# Altium PCB PCB1.PcbDoc
Units mm, origin at the board's own origin, x right, y up, seen from the top; angles counter-clockwise.
Board outline 88 x 61.5 mm, 2 copper layers (Top Layer, Bottom Layer); 22 components, 29 nets, 107 pads, 10 vias.
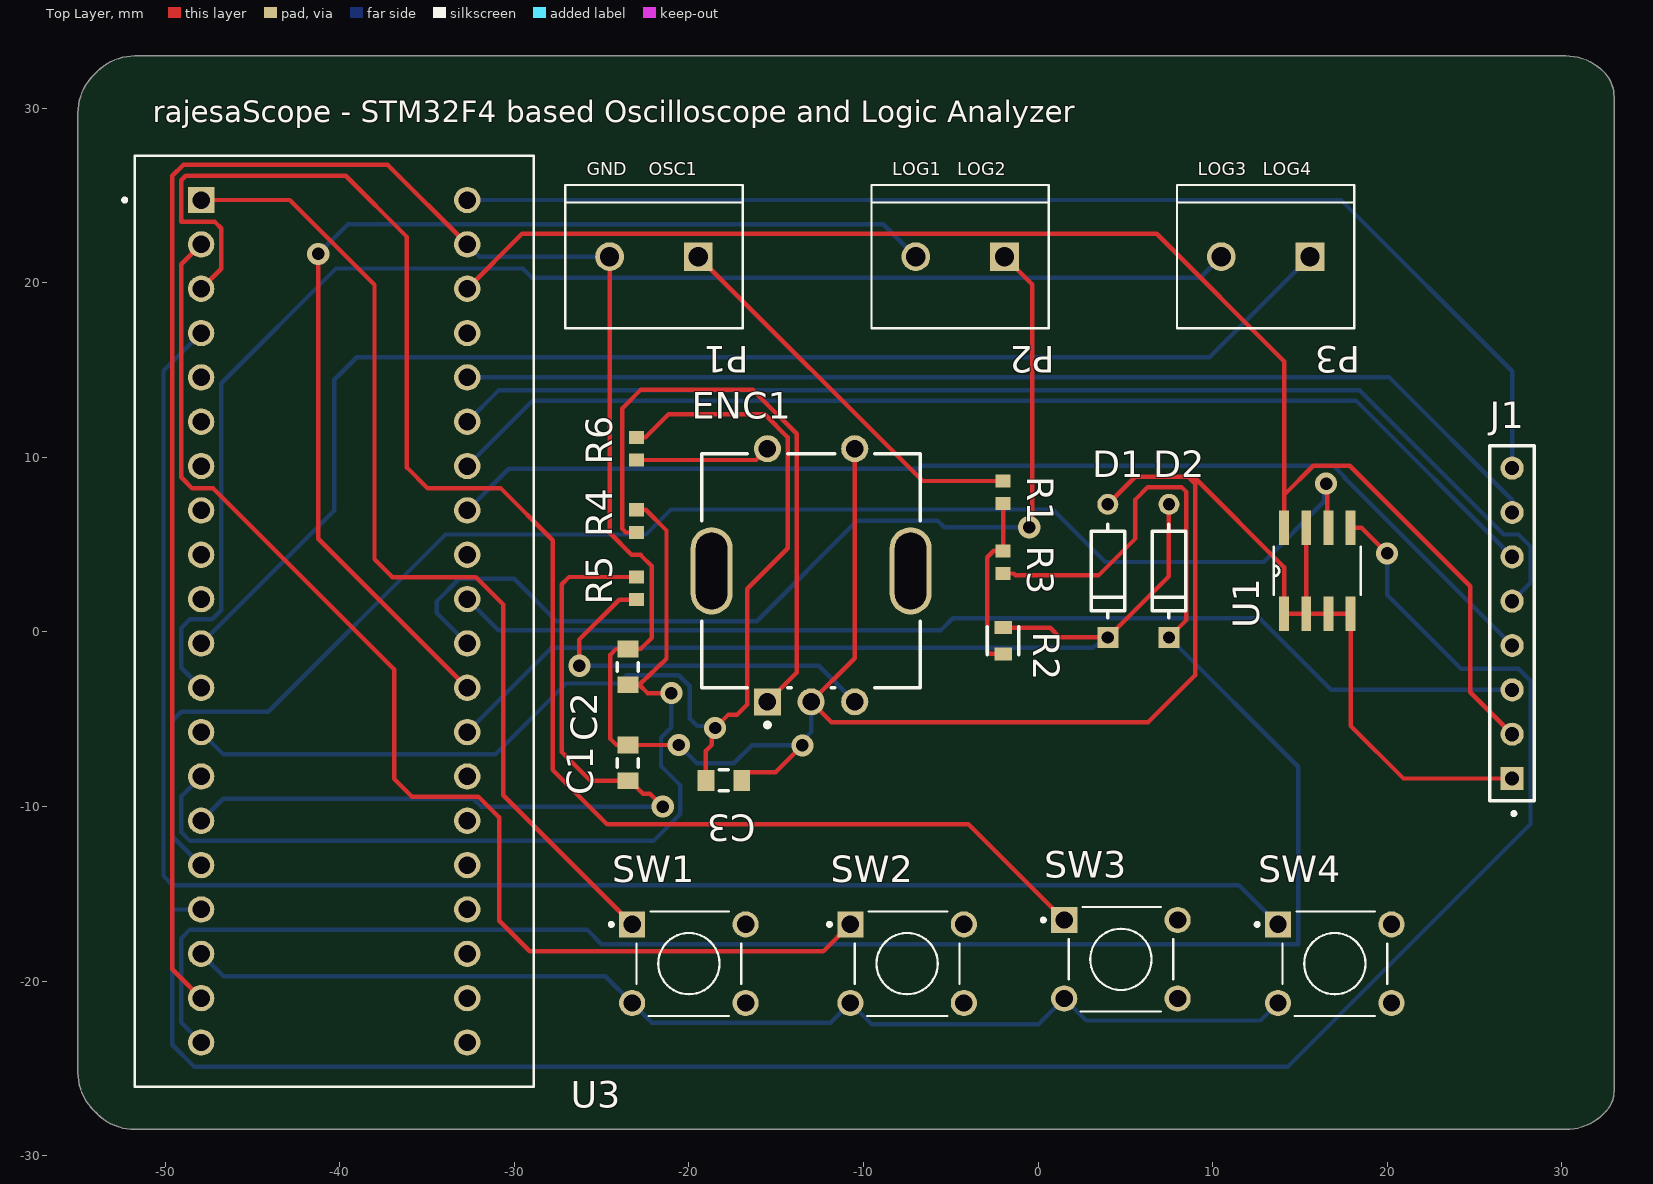
[diagram p0: Top Layer view]
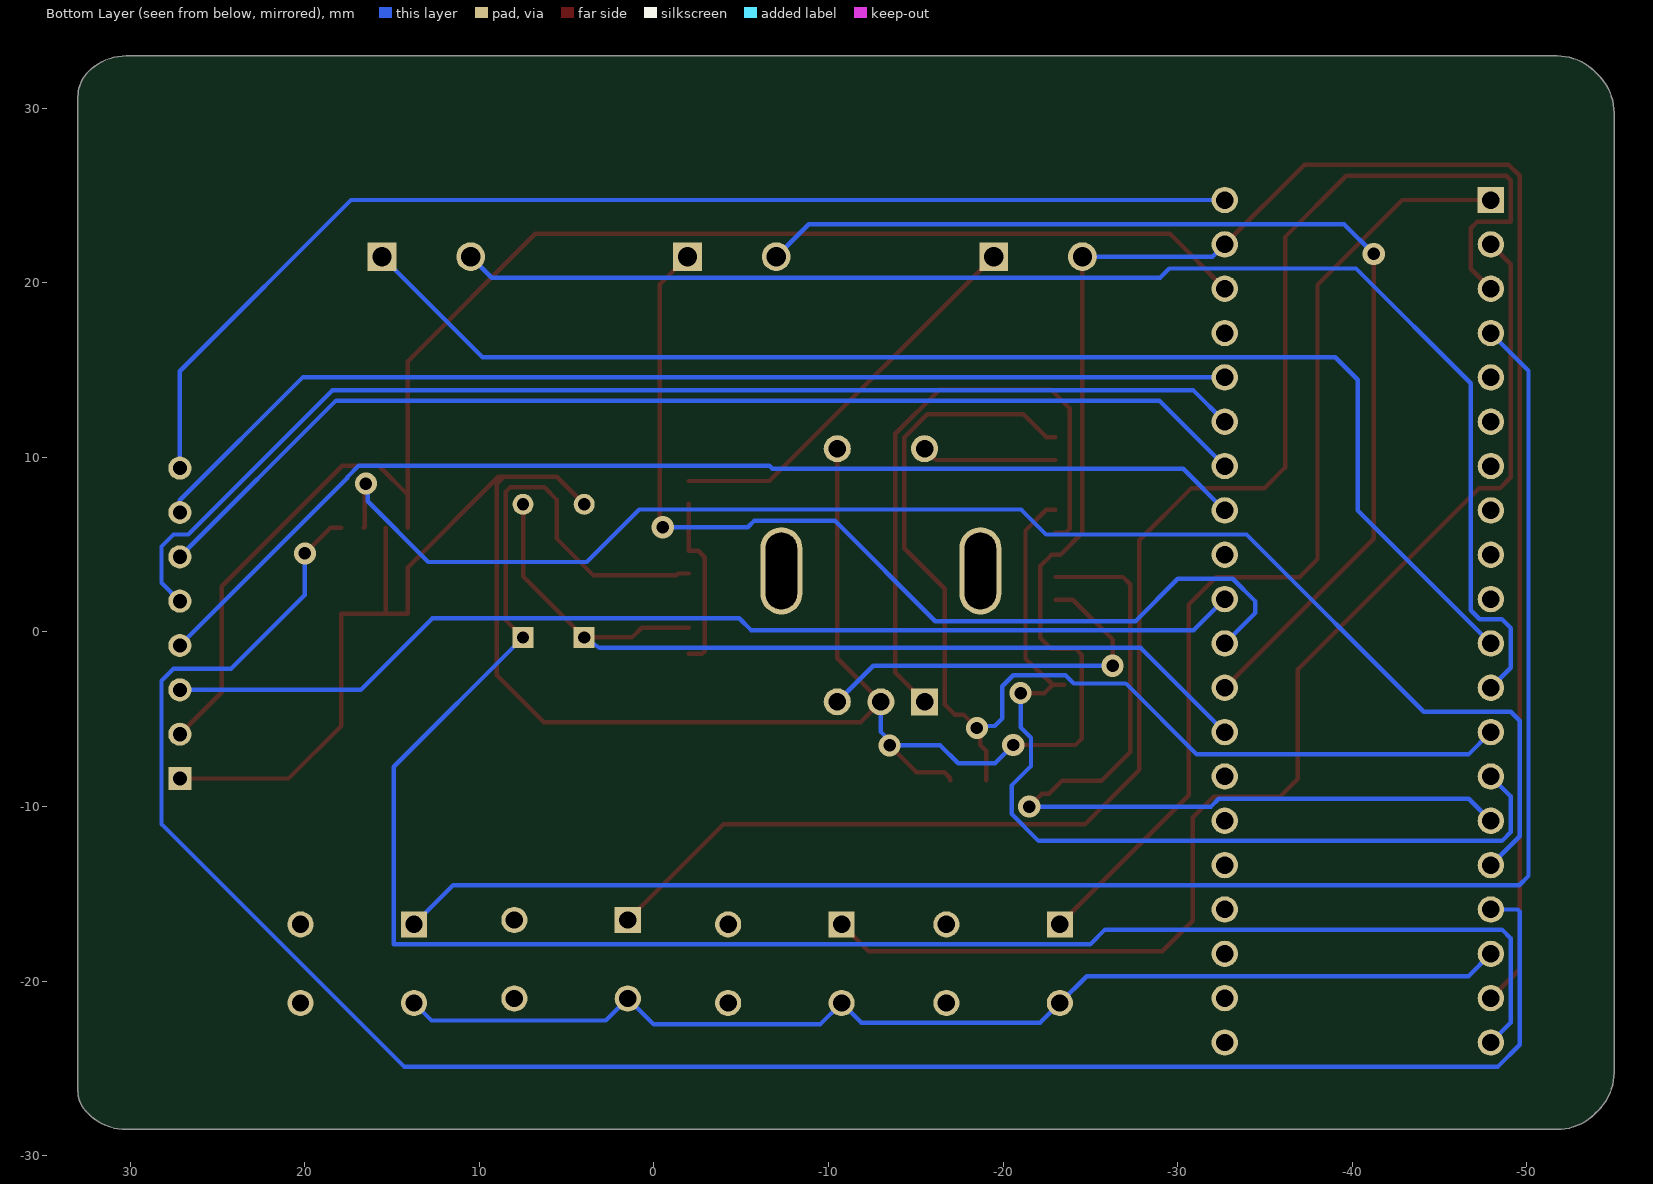
[diagram p1: Bottom Layer view, seen from below]
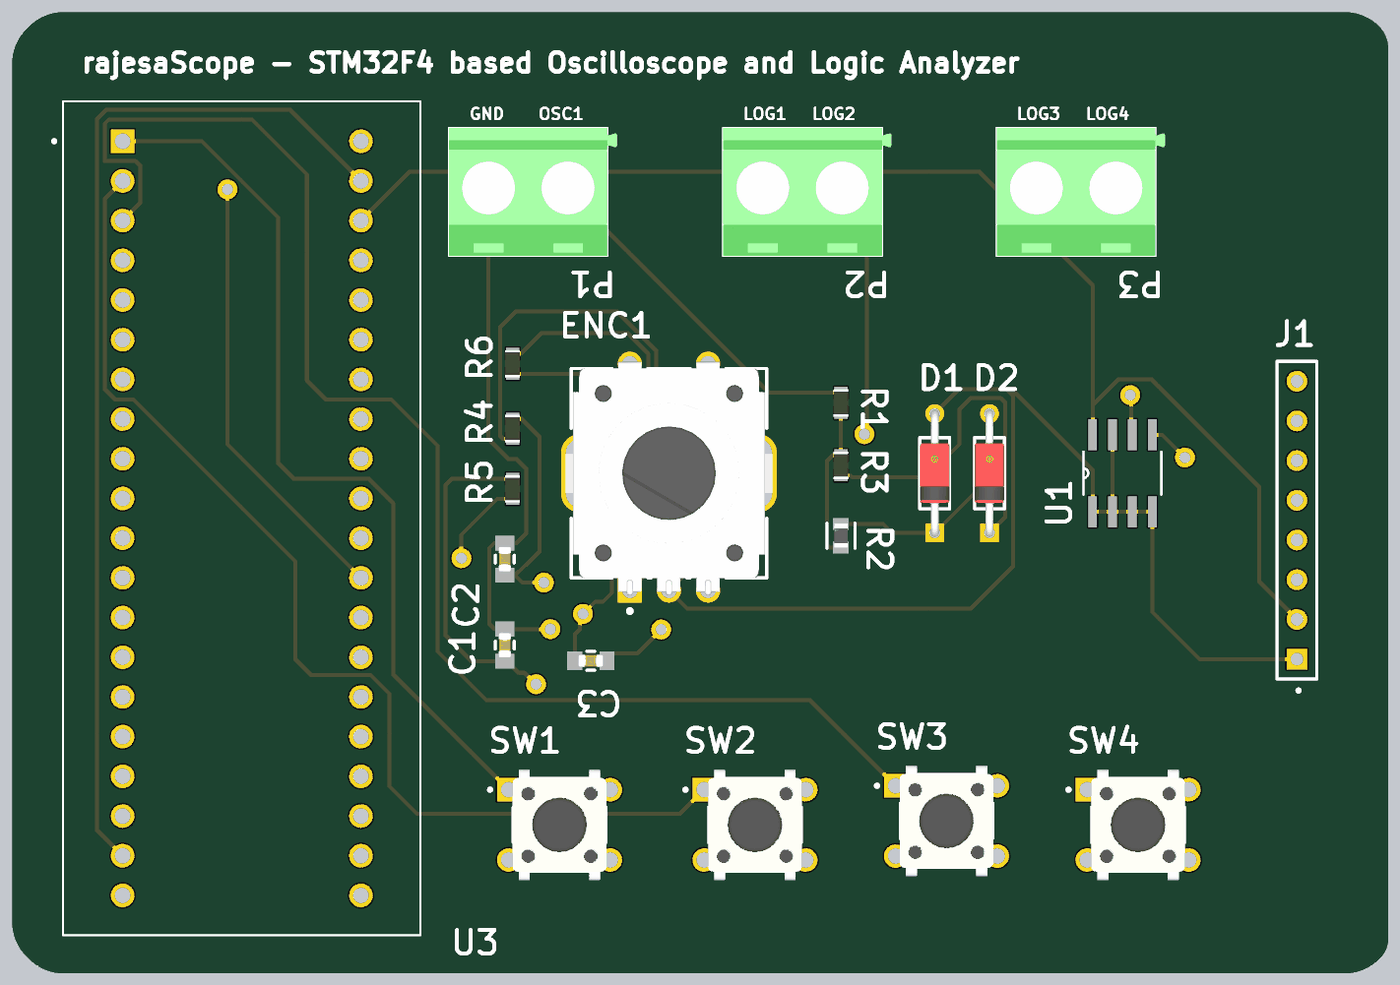
[diagram p2: 3D render of the assembled board from above, using the file's embedded part models]

## Layer stack, top to bottom
Top Solder: solder mask 0.0102, Solder Resist, Dk 3.5
Top Layer: signal copper 0.0356
Dielectric 1: dielectric 0.32, FR-4, Dk 4.8
Bottom Layer: signal copper 0.0356
Bottom Solder: solder mask 0.0102, Solder Resist, Dk 3.5

## Board outline
-54.102,-27.398 cw(c-51.934,-25.23) -55,-25.23 -55,29.73 cw(c-51.934,29.73) -54.102,31.898 -53.898,32.102 cw(c-51.73,29.934) -51.73,33 30.23,33 cw(c30.23,29.934) 32.398,32.102 cw(c30.945,30.649) 33,30.649 33,-26.293 cw(c31.293,-26.293) 32.5,-27.5 32.398,-27.602 cw(c30.23,-25.434) 30.23,-28.5 -51.73,-28.5 cw(c-51.73,-25.434) -53.898,-27.602

## Design rules (kind name [scope] priority, off if disabled: settings)
Clearance [All] p1: gap=0.254 ignorepadtopadclearanceinfootprint=FALSE
PolygonConnect [All] p1: connectstyle=Relief reliefconductorwidth=0.254 reliefentries=4 polygonreliefangle="90 Angle" airgapwidth=0.254
RoutingVias [All] p1: holewidth=0.711 width=1.27 viastyle="Through Hole" minholewidth=0.711 minwidth=1.27 maxholewidth=0.711 maxwidth=1.27
SolderMaskExpansion [All] p1: expansion=0.102 istentingtop=FALSE
SupplyNets "Schematic Supply Nets" [InNet('GND')] p1: voltage=0.000
Width [All] p1: maxlimit=0.254 minlimit=0.254 preferedwidth=0.254
30 further rules are at their usual default settings.

## Components (designator, comment, footprint, x,y, rotation, side; value= is the part's Value field where it differs from the comment)
C1 "CGA3E2X7R1H104K080AA" FP-CGA3E-0_3-0_1-IPC_A -23.5,-7.5 r90 top
C2 "CGA3E2X7R1H104K080AA" FP-CGA3E-0_3-0_1-IPC_A -23.5,-2 r90 top
C3 "CGA3E2X7R1H104K080AA" FP-CGA3E-0_3-0_1-IPC_A -18,-8.5 r180 top
D1 "1N4148" FP-017AG-MFG 4,3.5 r90 top
D2 "1N4148" FP-017AG-MFG 7.5,3.5 r90 top
ENC1 "PEC11R-4215F-S0024" FP-PEC11R-4215F-S0024-MFG -13,3.5 r0 top
J1 "TS-108-X-A-1" SAMTEC_TS-108-X-A-1 27.16,0.495 r90 top
P1 "282837-2" TE_282837-2 -22,21.5 r180 top
P2 "282837-2" TE_282837-2 -4.46,21.5 r180 top
P3 "282837-2" TE_282837-2 13.04,21.5 r180 top
R1 "ERJ3EKF1002V" RESC1609X55X30LL15T15 -2,8 r270 top
R2 "CRCW06031K00FKEA" FP-CRCW0603-e3-MFG -2,-0.5 r90 top
R3 "ERJ3EKF1002V" RESC1609X55X30LL15T15 -2,4 r270 top
R4 "ERJ3EKF1002V" RESC1609X55X30LL15T15 -23,6.35 r90 top
R5 "ERJ3EKF1002V" RESC1609X55X30LL15T15 -23,2.5 r90 top
R6 "ERJ3EKF1002V" RESC1609X55X30LL15T15 -23,10.5 r90 top
SW1 "1825910-6" SW_1825910-6-4 -20,-19 r0 top
SW2 "1825910-6" SW_1825910-6-4 -7.5,-19 r0 top
SW3 "1825910-6" SW_1825910-6-4 4.75,-18.75 r0 top
SW4 "1825910-6" SW_1825910-6-4 17,-19 r0 top
U1 "AT24C01A-10SI-2.7" SOIC127P600X175-8N 16,3.5 r90 top
U3 "STM32F103C8T6" MODULE_ZC323000 -40.319,0.614 r0 top

## Footprints (in the part's own frame and the unit in brackets; to place one, negate y for a bottom-side part, rotate by r counter-clockwise, add the part's x,y. Pads: shape width x height; smd on the part's side, far side on the other; paste and mask are expansions set on the pad)
FP-017AG-MFG [mm]
  rect 1.2x1.2 hole 0.7 paste-2539.97 mask+0: 1(-3.813,0)
  round 1.2 hole 0.7 paste-2539.97 mask+0: 2(3.813,0)
  silkscreen extent -2.68,-0.96 2.68,0.95, body extent -4.51,-1.05 4.51,1.05, height 0.25
FP-CGA3E-0_3-0_1-IPC_A [mm]
  rect 0.956x1.206 smd paste+0 mask+0: 1(-1.025,0) 2(1.025,0)
  silkscreen extent -0.25,-0.6 0.25,0.6, body extent -2,-1.1 2,1.1, height 0.25
FP-CRCW0603-e3-MFG [mm]
  rect 0.75x1 smd paste+0 mask+0: 1(-0.75,0) 2(0.75,0)
  silkscreen extent -0.8,-0.9 0.8,0.9, body extent -1.22,-0.6 1.22,0.6, height 0.25
FP-PEC11R-4215F-S0024-MFG [mm]
  round 1.55 hole 1 paste-2539.97 mask+0: 1(-2.5,7) 2(2.5,7) B(2.5,-7.5) C(0,-7.5)
  rrect100% 2.4x5 hole 4.4 slot 1.8 at 0 deg paste-2539.97 mask+0: 3(-5.7,0) 4(5.7,0)
  rect 1.55x1.55 hole 1 paste-2539.97 mask+0: A(-2.5,-7.5)
  silkscreen extent -6.25,-8.95 6.25,6.7, body extent -7,-8.37 7,7.88, height 0.25
MODULE_ZC323000 [mm]
  rect 1.508x1.508 hole 1: 1(-7.62,24.13)
  round 1.508 hole 1: 2(-7.62,21.59) 3(-7.62,19.05) 4(-7.62,16.51) 5(-7.62,13.97) 6(-7.62,11.43) 7(-7.62,8.89) 8(-7.62,6.35) 9(-7.62,3.81) 10(-7.62,1.27) 11(-7.62,-1.27) 12(-7.62,-3.81) 13(-7.62,-6.35) 14(-7.62,-8.89) 15(-7.62,-11.43) 16(-7.62,-13.97) 17(-7.62,-16.51) 18(-7.62,-19.05) 19(-7.62,-21.59) 20(-7.62,-24.13) 21(7.62,-24.13) 22(7.62,-21.59) 23(7.62,-19.05) 24(7.62,-16.51) 25(7.62,-13.97) 26(7.62,-11.43) 27(7.62,-8.89) 28(7.62,-6.35) 29(7.62,-3.81) 30(7.62,-1.27) 31(7.62,1.27) 32(7.62,3.81) 33(7.62,6.35) 34(7.62,8.89) 35(7.62,11.43) 36(7.62,13.97) 37(7.62,16.51) 38(7.62,19.05) 39(7.62,21.59) 40(7.62,24.13)
  silkscreen extent -12.1,-26.67 11.43,26.67
RESC1609X55X30LL15T15 [mm] "Chip Resistor, 2-Leads, Body 1.75x0.95mm, IPC High Density"
  rect 0.75x0.85 smd: 1(-0.65,0) 2(0.65,0)
  body extent -0.87,-0.48 0.87,0.48, height 0.55
SAMTEC_TS-108-X-A-1 [mil]
  rect 52x52 hole 32: 01(-350,0)
  round 52 hole 32: 02(-250,0) 03(-150,0) 04(-50,0) 05(50,0) 06(150,0) 07(250,0) 08(350,0)
  silkscreen extent -433,-50 400,50
SOIC127P600X175-8N [mil]
  rect 78x22 smd: 1(-97,75) 2(-97,25) 3(-97,-25) 4(-97,-75) 5(97,-75) 6(97,-25) 7(97,25) 8(97,75)
  silkscreen extent -54,-98 54,98
SW_1825910-6-4 [mm]
  rect 1.498x1.498 / inner round 1.498 / far side rect 1.498x1.498 hole 0.99: 1(-3.25,2.25)
  round 1.498 hole 0.99: 2(3.25,2.25) 3(-3.25,-2.25) 4(3.25,-2.25)
  silkscreen extent -4.54,-3 3,2.99, body extent -3,-3.9 3,3.9, height 5.01
TE_282837-2 [mm]
  rect 1.65x1.65 / inner round 1.65 / far side rect 1.65x1.65 hole 1.1: 1(-2.54,0)
  round 1.65 hole 1.1: 2(2.54,0)
  silkscreen extent -5.08,-4.1 5.08,4.1, body extent -5.68,-4.1 5.08,4.1, height 10

## Part data
C1 C2 C3: library part CMP-2000-07546-2, "Cap Ceramic 100nF 50V X7R 10% Pad SMD 0603 +125°C Automotive T/R", Capacitance=100nF, Case Code (Imperial)=0603, Case Code (Metric)=1608, Dielectric=X7R, Max Operating Temperature=125°C, Min Operating Temperature=-55°C, Package Quantity=1, Ratings=AEC-Q200, Tolerance=10%, Voltage=50V, Case/Package=0603, Composition=Ceramic, Depth=0.8mm, Height=0.8mm, Lead Free="Lead Free", Length=1.6mm, Mount="Surface Mount", Packaging="Tape and Reel", Radiation Hardening=No, REACH SVHC="No SVHC", Termination=SMD/SMT, Thickness=0.035inch, Voltage Rating=50V, Voltage Rating (DC)=50V, Weight=7.1E-05oz, Width=0.8mm
D1 D2: library part CMP-07163-000046-1, "DIODE GEN PURP 100V 200MA DO35", Average Rectified Current=200mA, Capacitance=4pF, Case/Package=DO-35, Current=4A, Forward Current=300mA, Forward Voltage=1V, Max Forward Surge Current (Ifsm)=1A, Max Operating Temperature=175°C, Max Power Dissipation=500mW, Max Repetitive Reverse Voltage (Vrrm)=100V, Max Reverse Current=5uA, Min Operating Temperature=-65°C, Package Quantity=2000, Contact Plating=Tin, Current Rating=200mA, Diameter=1.91mm, Element Configuration=Single, Height=4.56mm, Lead Free="Lead Free", Length=4.56mm, Max Reverse Voltage (DC)=100V, Max Surge Current=4A, Mount="Through Hole", Number of Pins=2, Output Current=200mA, Outside Diameter=1.85mm, Packaging=Bulk, Peak Non-Repetitive Surge Current=4A, Polarity=Standard, Power Dissipation=500mW, Radiation Hardening=No, REACH SVHC="No SVHC", Recovery Time=4ns, Reverse Recovery Time=4ns, Reverse Voltage=100V, Series=-, Voltage=100V, Voltage Rating (DC)=100V, Weight=0.01lb, Width=1.91mm
ENC1: library part CMP-1747-00012-2, "ROTARY ENCODER MECHANICAL 24PPR", Max Operating Temperature=70°C, Min Operating Temperature=-30°C, Package Quantity=150, Built in Switch=Yes, Detent=Yes, Encoder Type=Mechanical, Height=13.4mm, Hole Diameter=1.8mm, Length=21.5mm, Mount="Through Hole", Number of Channels=2, Orientation=Vertical, Output Type=Quadrature, Packaging=Bulk, Pulses per Revolution=24, Radiation Hardening=No, REACH SVHC="No SVHC", RoHS Compliant=Yes, Series=PEC11R, Termination="PC Pins", Type=Mechanical, Width=12.5mm
J1: "TS Series .100 Single Row Screw Machine Terminal Strip", Package=None, Availability=Bad, Check_prices=https://www.snapeda.com/parts/TS-108-G-A-1/Samtec/view-part/4699387/?ref=eda, MF=Samtec, MP=TS-108-G-A-1, Price=None, SnapEDA_Link=https://www.snapeda.com/parts/TS-108-G-A-1/Samtec/view-part/4699387/?ref=snap
P1 P2 P3: "Ð Ð°Ð·ÑŠÐµÐ¼Ð½Ñ‹Ðµ ÐºÐ»ÐµÐ¼Ð¼Ð½Ñ‹Ðµ ÐºÐ¾Ð»Ð¾Ð´ÐºÐ¸ Ð Ð¾Ð·ÐµÑ‚ÐºÐ° 2 Ð¿Ð¾Ð»Ð¾Ð¶ÐµÐ½Ð¸Ñ 5,08 Ð¼Ð¼ ÐŸÑ€Ð¸Ð¿Ð¾Ð¹ Ð¿Ñ€ÑÐ¼Ð¾Ð¹ Ñ‡ÐµÑ€ÐµÐ· Ð¾Ñ‚Ð²ÐµÑ€ÑÑ‚Ð¸Ðµ 13,5 Ð / ÐºÐ¾Ð½Ñ‚Ð°ÐºÑ‚", Package=None, Availability="In Stock", Check_prices=https://www.snapeda.com/parts/282837-2/TE+Connectivity+AMP+Connectors/view-part/?ref=eda, MF="TE Connectivity", MP=282837-2, Price=None, Purchase-URL=https://pricing.snapeda.com/search/part/282837-2/?ref=eda, SnapEDA_Link=https://www.snapeda.com/parts/282837-2/TE+Connectivity+AMP+Connectors/view-part/?ref=snap
R1 R3 R4 R5 R6: library part CMP-1012-00623-3, "Chip Resistor, 10 KOhm, +/- 1%, 0.1 W, -55 to 155 degC, 0603 (1608 Metric), RoHS, Tape and Reel", Case Code (Imperial)=0603, Case Code (Metric)=1608, Manufacturer=Panasonic, Max Operating Temperature=155degC, Max Power Dissipation=100mW, Min Operating Temperature=-55degC, Package Description="2-Pin Surface Mount Device, Body 1.6 x 0.85 mm", Package Quantity=1, Package Reference=603, Resistance=10KOhm, Temperature Coefficient=100ppm\/degreesC, Tolerance=1%, Voltage Rating=75V, Case\/Package=0603, Composition=ThickFilm, Contact Plating=Tin, Datasheet URL=https://industrial.panasonic.com/cdbs/www-data/pdf/RDA0000/AOA0000C304.pdf, Datasheet Version=02/2017, Depth=0.8mm, Height=0.45mm, Lead Free=LeadFree, Length=1.6mm, Manufacturer URL=http://www.panasonic.com/, Military Standard=Not, Mount=SurfaceMount, Mounting Technology=SurfaceMount, Number of Pins=2, Number of Terminations=2, Packaging=TapeandReel, Power Rating=100mW, Radiation Hardening=No, REACH SVHC=NoSVHC, RoHSCompliant=true, Termination=SMD/SMT, Voltage Rating (DC)=75V, Width=0.031inch
R2: library part CMP-1666-00003-5, "RES Thick Film, 1kΩ, 1%, 0.1W, 100ppm/°C, 0603", Case Code (Imperial)=0603, Case Code (Metric)=1608, Max Operating Temperature=155°C, Max Power Dissipation=100mW, Min Operating Temperature=-55°C, Package Quantity=10, Resistance=1kR, Temperature Coefficient=100ppm/°C, Tolerance=1%, Voltage Rating=75V, Case/Package=0603, Composition="Thick Film", Contact Plating=Tin, Depth=0.85mm, Features="Automotive AEC-Q200", Height=0.45mm, Lead Free="Lead Free", Length=1.55mm, Military Standard=Not, Mount="Surface Mount", Number of Pins=2, Number of Terminations=2, Packaging="Tape and Reel", Power Rating=100mW, Radiation Hardening=No, Termination=SMD/SMT, Voltage Rating (DC)=75V, Weight=7.1E-05oz, Width=0.033inch
SW1 SW2 SW3 SW4: "Switch Push Button OFF (ON) SPST Round Button 0.05A 24VDC Momentary Contact PC Pins Thru-Hole", Package=None, Check_prices=https://www.snapeda.com/parts/1825910-6/TE+Connectivity+ALCOSWITCH+Switches/view-part/?ref=eda, Digi-Key_Part_Number=450-1650-ND, MF="TE Connectivity", MP=1825910-6, Purchase-URL=https://pricing.snapeda.com/search/part/1825910-6/?ref=eda, SnapEDA_Link=https://www.snapeda.com/parts/1825910-6/TE+Connectivity+ALCOSWITCH+Switches/view-part/?ref=snap
U1: "Two-wire Serial EEPROM", Package=None, Availability=Unavailable, MP=AT24C01A-10SI-2.7, Price=None
U3: library part BluePill, "Designed By @Alixahedi"

## Via types
v1: diameter 1.27, hole 0.711, Top Layer to Bottom Layer, 10 vias

## Nets (pads, with @x,y where several pads share a name; then routed paths per layer and width w, separated by ;. In a path a pad name is that pad's centre, name@x,y a point inside that pad or via, vN(x,y) a via of type N, cw(c..) or ccw(c..) an arc to the next point about the centre after c; other vN are vias at no path point)
3V: D2.1 R3.2 U3.20 | length 114.4
  Top Layer w0.254: R3.2 -1.401,3.35 -1.291,3.24 3.463,3.24 5.578,5.355 5.578,7.59 6.29,8.301 8.22,8.301 8.499,8.022 8.499,0.686 D2.1
  Bottom Layer w0.254: U3.20 -49.082,-22.373 -49.082,-17.556 -48.574,-17.048 -25.841,-17.048 -25.003,-17.886 14.9,-17.886 14.9,-7.713 D2.1
3V-2: J1.02 U1.8 U3.38 | length 84.3
  Top Layer w0.254: U3.38 -29.558,22.805 6.805,22.805 14.095,15.515 14.095,7.844 ; U1.8 14.095,7.844 ; J1.02 24.755,-3.45 24.755,2.612 17.851,9.516 15.767,9.516 14.095,7.844
5V: SW1.3 SW2.3 SW3.3 SW4.3 U3.18 | length 65.9
  Bottom Layer w0.254: U3.18 -46.66,-19.715 -24.785,-19.715 SW1.3 -22.118,-22.382 -11.882,-22.382 SW2.3 -9.516,-22.484 0.016,-22.484 SW3.3 2.755,-22.255 12.745,-22.255 SW4.3
5V-2: J1.08 U3.40 | length 69.5
  Bottom Layer w0.254: U3.40 17.355,24.744 27.16,14.939 J1.08
A2: D1.1 D2.2 R2.2 U3.28 | length 54.2
  Top Layer w0.254: R2.2 0.702,0.25 1.265,-0.313 D1.1 7.5,3.187 D2.2
  Bottom Layer w0.254: U3.28 -27.873,-0.91 3.131,-0.91 D1.1
A3: P2.2 U3.29 | length 64.1
  Top Layer w0.254: v1(-41.234,21.662) -41.234,5.339 U3.29
  Bottom Layer w0.254: v1(-41.234,21.662) -39.532,23.363 -8.863,23.363 P2.2
A4: P2.1 U3.30 | length 57.4
  Top Layer w0.254: P2.1 -0.34,19.92 -0.34,6.16 v1(-0.5,6)
  Bottom Layer w0.254: U3.30 -34.452,1.097 -34.452,1.748 -33.157,3.043 -30.007,3.043 -27.583,0.619 -16.113,0.619 -10.351,6.381 -5.754,6.381 -5.372,6 v1(-0.5,6)
A5: J1.03 U3.31 | length 62.6
  Bottom Layer w0.254: U3.31 -30.926,0.111 -5.558,0.111 -4.886,0.783 12.69,0.783 16.788,-3.315 J1.03
A7: J1.04 U3.33 | length 65.2
  Bottom Layer w0.254: U3.33 -30.319,9.344 -6.785,9.344 -6.613,9.516 16.921,9.516 17.583,8.854 17.583,8.802 J1.04
B0: J1.06 U3.34 | length 65.1
  Bottom Layer w0.254: U3.34 -28.949,13.254 18.211,13.254 J1.06
B1: J1.05 U3.35 | length 68.9
  Bottom Layer w0.254: U3.35 -30.905,13.838 18.431,13.838 26.686,5.583 27.524,5.583 28.21,4.898 28.21,2.815 J1.05
B2: J1.07 U3.36 | length 63.5
  Bottom Layer w0.254: U3.36 -32.683,14.6 20.107,14.6 27.16,7.548 J1.07
GND: C1.2 C2.2 C3.1 D1.2 ENC1.2 ENC1.C J1.01 P1.2 U1.1 U1.2 U1.3 U1.4 U1.7 U3.19 U3.39 | length 217
  Top Layer w0.254: U3.19 -49.59,-19.325 -49.59,26.132 -48.955,26.767 -37.262,26.767 U3.39 ; P1.2 -24.54,5.679 -23.276,4.415 -22.768,4.415 -22.133,3.78 -22.133,-0.34 -22.768,-0.975 C2.2 -24.17,-0.975 -24.495,-1.3 -24.495,-6.126 -24.146,-6.475 C1.2 v1(-20.584,-6.475) ; C3.1 -16.975,-8.375 -16.624,-8.024 -15.024,-8.024 v1(-13.5,-6.5) ; ENC1.2 -10.5,-1.5 ENC1.C -11.839,-5.161 6.315,-5.161 9.007,-2.468 9.007,8.479 8.601,8.885 ; D1.2 5.572,8.885 8.601,8.885 ; U1.7 U1.2 ; J1.01 20.936,-8.395 17.905,-5.364 U1.4 U1.3 U1.2 ; 8.601,8.885 8.913,8.885 14.095,3.704 U1.1 U1.2
  Bottom Layer w0.254: U3.39 -31.995,21.5 P1.2 ; v1(-20.584,-6.475) -19.535,-7.524 -17.425,-7.524 -16.401,-6.5 v1(-13.5,-6.5) -13.5,-6.225 -13,-5.725 ENC1.C
NetENC1_1: ENC1.1 R6.1 | length 7.8
  Top Layer w0.254: R6.1 -16.15,9.85 ENC1.1
NetENC1_A: ENC1.A R4.1 | length 35.3
  Top Layer w0.254: R4.1 -23.606,5.7 -23.809,5.903 -23.809,12.822 -22.768,13.864 -16.335,13.864 -13.827,11.356 -13.827,-2.327 ENC1.A
NetENC1_B: ENC1.B R5.1 | length 22.3
  Top Layer w0.254: v1(-26.273,-1.935) -26.273,-0.436 -23.987,1.85 R5.1
  Bottom Layer w0.254: v1(-26.273,-1.935) -12.565,-1.935 ENC1.B
NetP1_1: P1.1 R1.1 | length 22.8
  Top Layer w0.254: P1.1 -6.61,8.65 R1.1
NetR1_2: R1.2 R2.1 R3.1 | length 10.1
  Top Layer w0.254: R2.1 -2.753,-1.25 -2.905,-1.098 -2.905,4.288 -2.543,4.65 R3.1 R1.2
PB3: P3.1 U3.11 | length 77.1
  Bottom Layer w0.254: U3.11 -40.319,6.964 -40.319,14.448 -39.024,15.743 9.823,15.743 P3.1
PB4: P3.2 U3.12 | length 80.3
  Bottom Layer w0.254: U3.12 -49.082,-2.053 -49.082,0.224 -48.574,0.732 -47.304,0.732 -46.796,1.24 -46.796,14.241 -40.214,20.823 -29.524,20.823 -28.991,20.29 9.29,20.29 P3.2
PB5: C3.2 R6.2 U3.13 | length 65.8
  Top Layer w0.254: R6.2 -22.48,11.15 -21.164,12.467 -15.656,12.467 -14.335,11.146 -14.335,4.793 -16.656,2.472 -16.656,-4.156 -17.231,-4.731 -17.731,-4.731 -18.694,-5.694 -18.694,-6.469 -19.025,-6.8 C3.2
  Bottom Layer w0.254: U3.13 -46.66,-7.015 -31.099,-7.015 -27.035,-2.951 -24.041,-2.951 -23.574,-2.484 -20.579,-2.484 -19.952,-3.111 -19.952,-4.951 -19.516,-5.387 -18.613,-5.387 v1(-18.5,-5.5)
PB6: C2.1 R4.2 U3.14 | length 55.2
  Top Layer w0.254: C2.1 -22.846,-3.025 ; R4.2 -22.469,7 -21.281,5.812 -21.281,-1.538 -22.846,-3.025 ; v1(-21,-3.5) -22.371,-3.5 -22.846,-3.025
  Bottom Layer w0.254: U3.14 -49.082,-9.419 -49.082,-11.46 -48.574,-11.968 -22.031,-11.968 -20.484,-10.421 -20.484,-8.795 -21.6,-7.68 -21.6,-6.054 -21,-5.455 v1(-21,-3.5)
PB7: C1.1 R5.2 U3.15 | length 48.3
  Top Layer w0.254: R5.2 -26.867,3.15 -27.289,2.728 -27.289,-6.874 -25.638,-8.525 -23.375,-8.525 -22.628,-9.272 -22.228,-9.272 v1(-21.5,-10)
  Bottom Layer w0.254: U3.15 -46.678,-9.555 -32.355,-9.555 -31.91,-10 v1(-21.5,-10)
PB8: U1.6 U3.16 | length 86.3
  Top Layer w0.254: v1(16.5,8.5) 16.568,8.432 16.568,6.031 U1.6
  Bottom Layer w0.254: U3.16 -49.59,-11.705 -49.59,-5.085 -49.082,-4.577 -44.104,-4.577 -33.944,5.583 -22.463,5.583 -21.031,7.016 0.851,7.016 3.858,4.009 12.927,4.009 16.402,7.484 16.402,8.402 v1(16.5,8.5)
PB9: U1.5 U3.17 | length 116.9
  Top Layer w0.254: U1.5 18.536,5.964 v1(20,4.5)
  Bottom Layer w0.254: U3.17 -49.472,-15.896 -49.59,-16.014 -49.59,-23.652 -48.346,-24.897 14.316,-24.897 28.21,-11.003 28.21,-2.799 27.524,-2.113 24.23,-2.113 20,2.117 v1(20,4.5)
PB12: SW1.1 U3.1 | length 57.5
  Top Layer w0.254: U3.1 -42.868,24.744 -38.008,19.884 -38.008,4.161 -36.992,3.145 -32.213,3.145 -30.642,1.574 -30.642,-9.358 SW1.1
PB13: SW2.1 U3.2 | length 71.2
  Top Layer w0.254: U3.2 -49.082,21.061 -49.082,8.86 -48.447,8.225 -47.254,8.225 -36.89,-2.138 -36.89,-8.412 -35.874,-9.428 -32.064,-9.428 -30.871,-10.622 -30.871,-16.54 -29.118,-18.293 -12.293,-18.293 SW2.1
PB14: SW3.1 U3.3 | length 92.6
  Top Layer w0.254: U3.3 -46.796,20.807 -46.796,23.135 -47.152,23.49 -49.082,23.49 -49.082,25.878 -48.828,26.132 -39.659,26.132 -36.154,22.627 -36.154,9.419 -34.96,8.225 -30.769,8.225 -27.797,5.253 -27.797,-7.904 -24.685,-11.016 -3.984,-11.016 SW3.1
PB15: SW4.1 U3.4 | length 97
  Bottom Layer w0.254: U3.4 -50.098,14.965 -50.098,-13.975 -49.565,-14.508 11.508,-14.508 SW4.1
pads on no net: ENC1.3 ENC1.4 SW1.2 SW1.4 SW2.2 SW2.4 SW3.2 SW3.4 SW4.2 SW4.4 U3.5 U3.6 U3.7 U3.8 U3.9 U3.10 U3.21 U3.22 U3.23 U3.24 U3.25 U3.26 U3.27 U3.32 U3.37

## Silkscreen, mask and mechanical layers (free items; w line width, h text height)
Top Overlay:
  text "rajesaScope - STM32F4 based Oscilloscope and Logic Analyzer" at -50.716,29.192 h1.22
  text "GND    OSC1" at -25.846,26.154 h0.72
  text "LOG1   LOG2" at -8.346,26.154 h0.72
  text "LOG3   LOG4" at 9.154,26.154 h0.72
Top Component Outline:
  lines w0.254: -55,-25.23 ccw(c-51.934,-25.23) -54.102,-27.398 -53.898,-27.602 ccw(c-51.73,-25.434) -51.73,-28.5 30.23,-28.5 ccw(c30.23,-25.434) 32.398,-27.602 32.5,-27.5 ccw(c31.293,-26.293) 33,-26.293 33,-23.73 33,30.649 ccw(c30.945,30.649) 32.398,32.102 ccw(c30.23,29.934) 30.23,33 -51.73,33 ccw(c-51.73,29.934) -53.898,32.102 -54.102,31.898 ccw(c-51.934,29.73) -55,29.73 -55,27.5 -55,-25.23